# Altium PCB layout.PcbDoc (part 2 of 3)
Units mm, origin at the board's own origin, x right, y up, seen from the top; angles counter-clockwise.
Board outline 100.08 x 22.99 mm, 2 copper layers (Top Layer, Bottom Layer); 117 components, 109 nets, 394 pads, 168 vias.
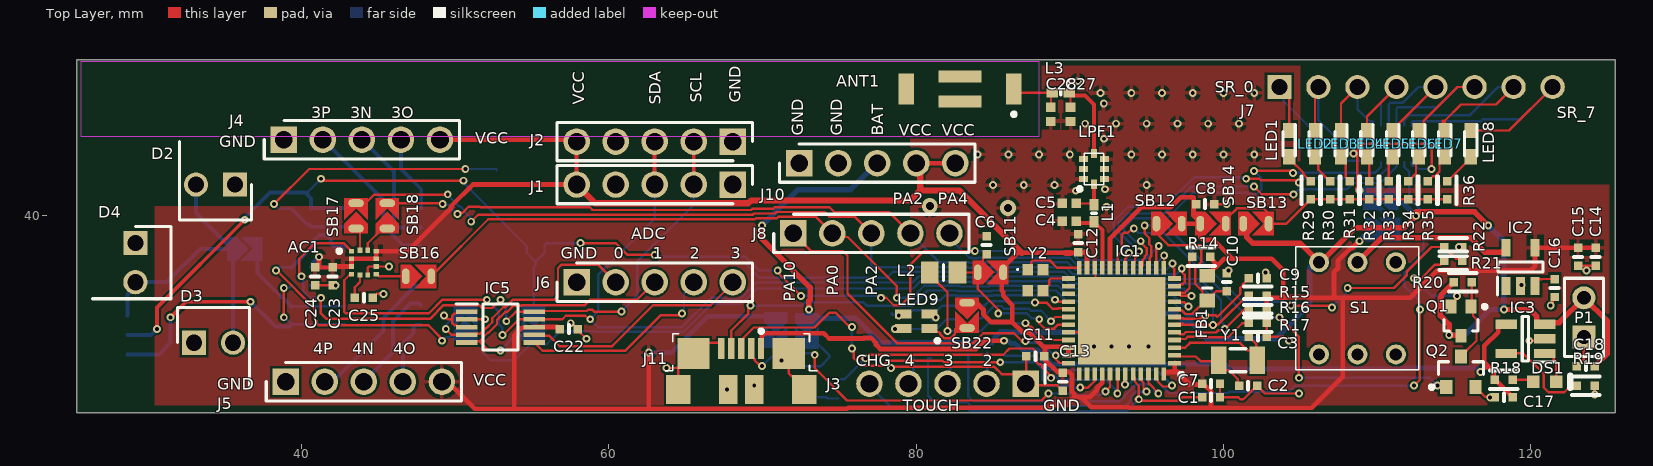
[diagram p0: Top Layer view]

## Via types
v1: diameter 0.508, hole 0.254, Top Layer to Bottom Layer, 166 vias
v2: diameter 1.016, hole 0.508, Top Layer to Bottom Layer, 2 vias

## Nets (pads, with @x,y where several pads share a name; then routed paths per layer and width w, separated by ;. In a path a pad name is that pad's centre, name@x,y a point inside that pad or via, vN(x,y) a via of type N, cw(c..) or ccw(c..) an arc to the next point about the centre after c; other vN are vias at no path point) (continued)
ADS_IN1: (continued)
  Top Layer w0.152: IC5.5@50.759,31.766 50.83,31.837 51.578,31.837 ; v1(52.959,31.242) 52.172,31.242 51.578,31.837 ; J6.3@62.992,35.687 61.85,34.545 58.81,34.545 58.461,34.195 54.343,34.195 54.311,34.163 53.81,34.163 53.403,33.757 53.267,33.757 52.73,33.22 52.73,32.948 52.175,32.392 52.133,32.392 51.578,31.837
  Bottom Layer w0.152: v1(52.959,31.242) 53.911,32.194 SB26.2@55.118,32.194
ADS_IN2: IC5.6 J6.4 | length 13.2
  Top Layer w0.152: IC5.6@55.159,31.766 55.708,31.217 61.062,31.217 63.373,33.528 64.643,33.528 v1(64.77,33.655)
  Bottom Layer w0.152: v1(64.77,33.655) 64.77,33.751 64.897,33.878 64.897,34.969 65.596,35.667 J6.4@65.596,35.687
ADS_IN3: IC5.7 J6.5 | length 15
  Top Layer w0.152: IC5.7@55.159,32.266 55.23,32.195 56.138,32.195 56.812,31.521 60.223,31.521 62.89,34.188 66.637,34.188 J6.5@68.135,35.687
BAT_OUT: C18.1 IC3.3 J10.3 P1.2 Q1.3 R20.2 S1.3 SB13.1 SB19.1 SB23.1 | length 103.4
  Top Layer w0.356: v1(69.977,39.37) 69.977,38.481 73.101,35.357 73.101,34.556 73.025,34.48 v1(73.025,33.909) ; SB13.1@101.282,39.497 101.282,39.202 101.524,38.96 101.524,38.598 101.895,38.227 104.973,38.227 S1.3@106.212,36.988 106.33,36.988 108.585,39.243 111.76,39.243 v1(112.522,40.005) ; 101.473,40.005 101.473,40.02 ; 112.522,40.259 116.332,40.259 v1(117.221,39.37) ; R20.2@114.986,35.687 114.173,34.874 114.173,34.744 114.113,34.684 114.113,33.51 114.681,32.942 v1(114.681,32.258) 114.702,32.237 115.403,32.237 Q1.3@115.443,32.197 ; v1(118.237,33.909) 119.929,33.909 120.362,33.476 120.362,33.076 120.485,32.954 IC3.3@120.884,32.954 120.984,33.054 121.827,33.054 P1.2@123.444,34.671 124.968,33.147 124.968,31.039 C18.1@124.155,30.226
  Bottom Layer w0.356: v1(69.977,39.37) 72.313,41.706 75.742,41.706 J10.3@77.47,43.434 ; SB19.1@72.898,33.337 SB19.1@72.962,33.337 ; v1(73.025,33.909) 73.025,33.401 72.974,33.35 76.061,33.35 77.661,31.75 84.916,31.75 85.141,31.975 85.141,32.119 85.483,32.461 85.967,32.461 85.992,32.436 86.88,32.436 91.332,32.436 92.551,33.655 96.877,33.655 97.41,33.122 97.815,33.122 98.933,32.004 103.378,32.004 105.607,34.233 105.607,36.638 105.956,36.988 S1.3@106.212,36.988 ; SB23.1@111.061,41.148 111.061,41.049 111.132,40.979 111.548,40.979 v1(112.522,40.005) ; v1(114.681,32.258) 115.697,32.258 117.348,33.909 v1(118.237,33.909) 118.237,38.354 v1(117.221,39.37)
BAT_SW: IC2.5 S1.2 | length 10.8
  Top Layer w0.356: S1.2@108.712,36.988 110.302,38.578 116.058,38.578 116.993,37.643 118.093,37.643 118.369,37.919 IC2.5@118.369,37.933
BATT_MEAS: IC1.15 R21.2 R22.1 | length 28.2
  Top Layer w0.152: v1(94.869,39.37) 94.869,38.856 95.174,38.551 95.174,38.147 95.301,38.02 95.301,37.367 95.19,37.256 95.19,36.699 IC1.15@95.116,36.625 ; v1(104.394,34.163) 106.972,34.163 107.061,34.074 v1(107.061,34.036) ; v1(108.077,35.306) 111.087,35.306 111.912,36.131 111.912,36.347 113.538,37.973 R22.1@114.351,37.973 115.105,37.219 115.384,37.219 R21.2@115.519,37.084
  Bottom Layer w0.152: v1(94.869,39.37) 96.266,39.37 101.219,34.417 103.886,34.417 104.14,34.163 v1(104.394,34.163) ; v1(107.061,34.036) 107.95,34.925 107.95,35.052 108.077,35.179 v1(108.077,35.306)
BATT_MEAS_CTRL: IC1.19 Q2.1 | length 29.4
  Top Layer w0.152: IC1.19@93.116,36.625 93.116,37.408 93.37,37.663 93.37,38.758 93.517,38.904 93.783,38.904 94.066,39.188 v1(94.162,39.188) ; v1(103.632,33.401) 104.902,32.131 v1(104.902,29.464) ; v1(113.919,28.956) 114.398,28.956 Q2.1@114.493,28.861
  Bottom Layer w0.152: v1(94.162,39.188) 94.463,38.887 96.114,38.887 101.6,33.401 v1(103.632,33.401) ; v1(104.902,29.464) 113.411,29.464 v1(113.919,28.956)
BUZZER: IC1.42 R28.1 | length 22.5
  Top Layer w0.152: v1@76.454,30.734 v1(76.708,30.734) 76.937,30.963 85.671,30.963 86.077,31.369 87.584,31.369 87.838,31.116 87.838,30.491 87.972,30.357 88.101,30.357 88.19,30.268 88.19,30.174 88.648,29.716 88.648,29.686 88.742,29.591 88.773,29.591 v1(88.773,29.464) ; v1(93.091,28.448) 93.116,28.473 IC1.42@93.116,29.725
  Bottom Layer w0.152: R28.1@74.93,29.286 75.014,29.37 75.344,29.37 v1(76.708,30.734) ; v1(88.773,29.464) 88.773,29.502 88.862,29.591 89.027,29.591 89.281,29.337 92.329,29.337 93.091,28.575 v1(93.091,28.448)
DIODE_ARRAY: D2.2 D3.2 D4.2 SB15.1 TP2.5 | length 20.9
  Bottom Layer w0.254: TP2.5@28.702,33.528 28.702,34.878 29.21,35.386 D4.2@29.21,35.687 31.242,35.687 33.401,37.846 SB15.1@35.496,37.846 ; D2.2@33.147,42.037 33.147,40.195 35.194,38.149 35.379,38.149 35.496,38.031 SB15.1@35.496,37.846 ; D3.2@35.56,31.75 35.56,37.338 35.545,37.353 35.545,37.797 SB15.1@35.496,37.846
GND: AC1.6 AC1.8 C1.2 C2.2 C3.2 C4.1 C5.1 C6.2 C7.2 C8.2 C9.2 C10.2 C11.2 C12.2 C13.2 C14.2 C15.2 C16.2 C17.2 C18.2 C21.2 C22.2 C23.2 C24.2 C25.2 C26.1 C27.1 C28.1 D2.1 D3.1 D4.1 IC1.22 IC1.32 IC1.49 IC2.2 IC3.2 IC4.3 IC4.11 IC5.1 IC5.3 J1.1 J2.1 J3.1 J4.1 J5.1 J6.1 J10.1 J10.2 J11.5 J11.6 J11.7 J11.8 J11.9 J11.10 J11.11 LPF1.1 LPF1.3 LPF1.5 LPF1.7 P1.1 Q2.2 R17.1 R19.1 R22.2 R23.2 R27.1 TP2.1 TP2.2 U1.8 | length 59.7
  Top Layer w0.152: C24.2@40.894,35.484 C23.2@42.037,35.484 v1(42.24,35.484) ; AC1.6@44.319,36.157 44.319,36.618 44.408,36.707 AC1.8@44.869,36.707 v1(45.716,36.707) ; C25.2@44.577,34.747 C25.2@44.653,34.671 44.907,34.925 v1(45.339,34.925) ; v1(49.276,33.528) 49.538,33.266 49.83,33.266 ; IC5.3@50.759,32.766 50.209,32.766 50.088,32.887 49.964,32.887 49.83,33.021 49.83,33.266 ; IC5.1@50.759,33.766 50.209,33.766 50.088,33.645 49.964,33.645 49.83,33.511 49.83,33.266 ; v1(57.531,33.02) 57.607,33.02 C22.2@57.988,32.639 58.187,32.44 58.187,32.364 v1(58.547,32.004) ; v1(63.754,30.099) 64.389,30.099 64.418,30.128 J11.6@64.545,30.128 ; J11.7@64.519,28.702 64.519,30.039 64.545,30.065 J11.6@64.545,30.128 ; J11.5@67.319,31.377 67.319,31.741 66.208,31.741 J11.6@65.519,31.052 64.82,30.353 64.643,30.353 64.643,30.226 J11.6@64.545,30.128 ; v1(67.691,28.702) J11.8@67.769,28.702 ; v1(71.247,30.58) J11.11@71.719,31.052 71.719,29.754 71.897,29.576 71.995,29.576 72.719,28.852 J11.10@72.719,28.702 ; v1(78.359,30.099) 78.435,30.175 85.093,30.175 85.565,29.704 86.501,29.704 J3.1@87.122,29.083 ; C11.2@87.173,30.861 87.173,29.134 J3.1@87.122,29.083 ; C13.2@89.535,28.626 89.175,28.986 88.977,28.986 88.973,28.981 88.573,28.981 88.569,28.986 87.346,28.986 87.249,29.083 J3.1@87.122,29.083 ; IC1.32@89.916,32.425 92.616,32.425 IC1.49@93.366,33.175 91.673,34.868 91.673,36.568 IC1.22@91.616,36.625 ; C8.2@99.39,40.767 v1(100.203,40.767) ; C7.2@99.771,29.083 C1.2@99.771,28.194 100.965,28.194 101.092,28.067 101.295,28.067 C2.2@102.184,28.956 102.692,28.448 v1(104.902,28.448) ; C10.2@100.203,36.271 100.33,36.398 v1(100.33,36.449) ; R17.1@102.819,33.043 C3.2@102.819,32.131 103.886,32.131 104.14,31.877 v1(104.267,31.877) ; v1(115.316,37.973) R22.2@115.519,37.973 ; Q2.2@116.393,28.861 116.393,28.811 116.717,28.487 116.767,28.487 117.015,28.239 117.303,28.239 v1(117.348,28.194) C17.2@117.653,28.194 ; IC2.2@119.319,35.433 v1(119.38,35.494) ; v1(119.888,31.877) 120.904,31.877 121.031,32.004 IC3.2@120.884,32.004 ; v1(121.285,34.163) 121.429,34.307 121.429,34.612 C16.2@121.539,34.722 ; C15.2@123.063,36.754 123.634,36.754 ; C18.2@123.186,30.027 C18.2@122.987,30.226 123.444,30.683 P1.1@123.444,32.131 ; v1(123.613,36.449) 123.634,36.471 123.634,36.754 ; v1(124.155,28.372) R19.1@124.155,28.956 ; C14.2@124.206,36.754 123.634,36.754
  Bottom Layer w0.152: v1(42.24,35.484) IC4.3@42.291,35.433 ; 69.469,28.702 69.533,28.766 69.533,28.892 v1(69.469,28.956) ; v1@78.359,29.972 v1(78.359,30.099) ; 102.743,36.068 v1(102.743,36.322) ; v1@119.761,32.004 v1(119.888,31.877) ; v1@123.571,36.449 v1(123.613,36.449) ; v1(124.155,28.372) v1@124.206,28.321
  Bottom Layer w0.254: C21.2@40.64,35.484 C21.2@40.691,35.433
  other v1: 91.567,31.496 92.71,31.496 93.853,31.496 95.123,31.496 92.385,40.595 90.387,41.637 92.281,41.733 85,42 87,42 89,42 95,42 84,44 86,44 88,44 90,44 94,44 96,44 98,44 100,44 102,44 92.222,45.017 91,46 93,46 95,46 97,46 99,46 101,46 92.211,47.303 92,48 94,48 96,48 98,48 100,48 102,48 90.531,48.785
  other v2: 85.979,40.513 80.899,40.64